# Altium PCB PulseAmplifier.PcbDoc
Units mil, origin at the board's own origin, x right, y up, seen from the top; angles counter-clockwise.
Board outline 4196.85 x 2165.35 mil, 2 copper layers (Top Layer, Bottom Layer); 92 components, 31 nets, 217 pads, 74 vias.
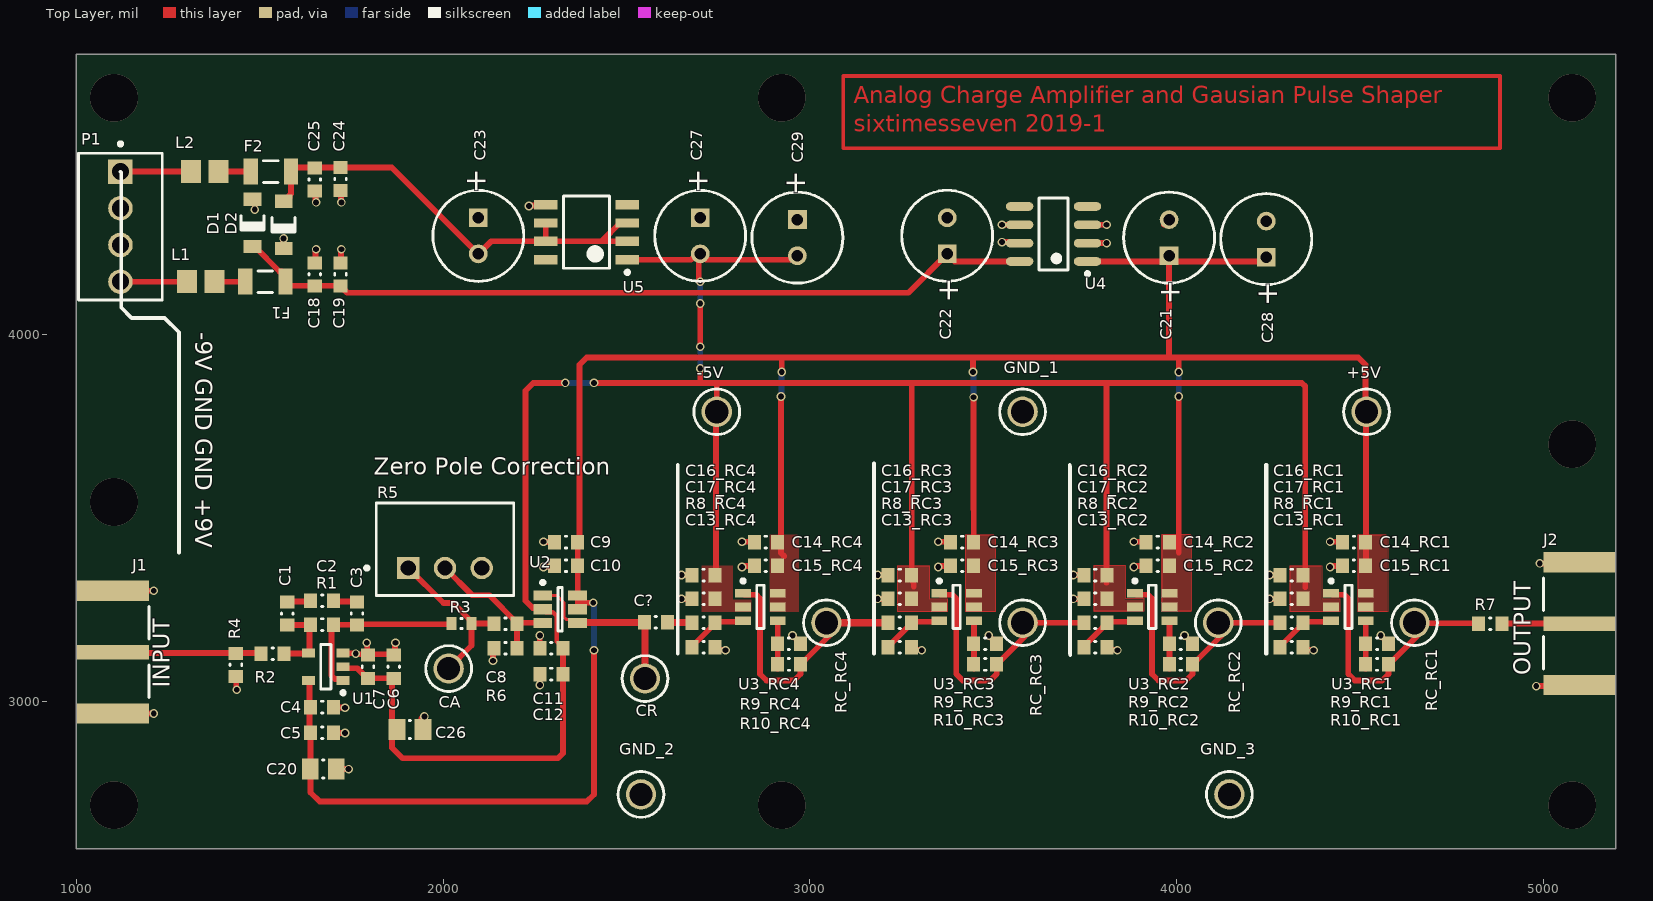
[diagram p0: Top Layer view]
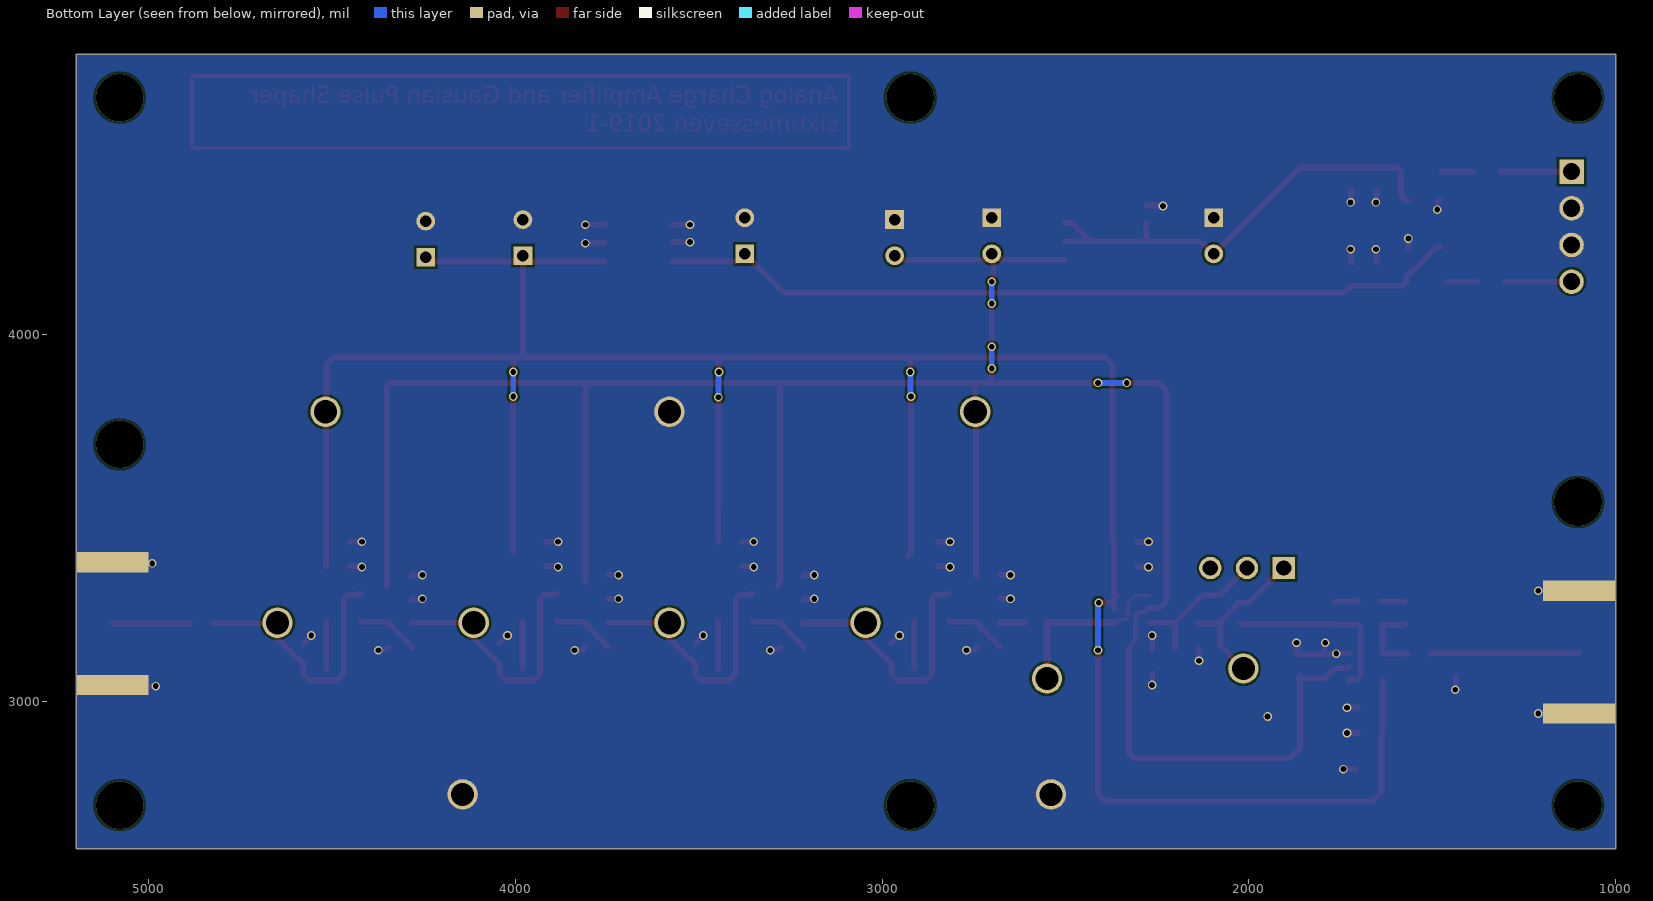
[diagram p1: Bottom Layer view, seen from below]

## Layer stack, top to bottom
Top Solder: solder mask 0.4, Solder Resist, Dk 3.5
Top Layer: signal copper 1.4
Dielectric 1: dielectric 12.6, FR-4, Dk 4.8
Bottom Layer: signal copper 1.4
Bottom Solder: solder mask 0.4, Solder Resist, Dk 3.5

## Board outline
1000,2598.43 5196.85,2598.43 5196.85,4763.78 1000,4763.78

## Design rules (kind name [scope] priority, off if disabled: settings)
Clearance [All] p1: gap=6.3 ignorepadtopadclearanceinfootprint=FALSE
PlaneConnect [All] p1: planeconnectstyle=Direct reliefexpansion=20 reliefentries=4 reliefconductorwidth=10 reliefairgap=10
PolygonConnect [All] p1: connectstyle=Direct reliefconductorwidth=10 reliefentries=4 polygonreliefangle="90 Angle" airgapwidth=10
RoomDefinition pulseAmplifier [InComponentClass('pulseAmplifier')] p1: confinementstyle=ConfineIn formatcopy=TRUE lockcomponents=FALSE outline 0,0 2000,0 2000,1000 0,1000
RoomDefinition Power [InComponentClass('Power')] p2: confinementstyle=ConfineIn formatcopy=TRUE lockcomponents=FALSE outline 0,0 2000,0 2000,1000 0,1000
RoomDefinition CR [InComponentClass('CR')] p3: confinementstyle=ConfineIn formatcopy=TRUE lockcomponents=FALSE outline 0,0 2000,0 2000,1000 0,1000
RoomDefinition CPA [InComponentClass('CPA')] p4: confinementstyle=ConfineIn formatcopy=TRUE lockcomponents=FALSE outline 0,0 2000,0 2000,1000 0,1000
RoomDefinition RC4 [InComponentClass('RC4')] p5: confinementstyle=ConfineIn formatcopy=TRUE lockcomponents=FALSE outline 2625,2949.17 3175,2949.17 3175,3654.17 2625,3654.17
RoomDefinition RC3 [InComponentClass('RC3')] p6: confinementstyle=ConfineIn formatcopy=TRUE lockcomponents=FALSE outline 3160,2949.17 3710,2949.17 3710,3654.17 3160,3654.17
RoomDefinition RC2 [InComponentClass('RC2')] p7: confinementstyle=ConfineIn formatcopy=TRUE lockcomponents=FALSE outline 3693.5,2949.17 4243.5,2949.17 4243.5,3654.17 3693.5,3654.17
RoomDefinition RC1 [InComponentClass('RC1')] p8: confinementstyle=ConfineIn formatcopy=TRUE lockcomponents=FALSE outline 4228.5,2949.17 4778.5,2949.17 4778.5,3654.17 4228.5,3654.17
RoutingVias [All] p1: holewidth=15.75 width=27.56 viastyle="Through Hole" minholewidth=15.75 minwidth=23.62 maxholewidth=196.85 maxwidth=3937.01
SolderMaskExpansion [All] p1: expansion=4
Width [All] p1: maxlimit=393.7 minlimit=6.3 preferedwidth=7.87
29 further rules are at their usual default settings.

## Classes and differential pairs
channel class RC: RC1 RC2 RC3 RC4
component class RC4: C13_RC4 C14_RC4 C15_RC4 C16_RC4 C17_RC4 R8_RC4 R9_RC4 R10_RC4 RC_RC4 U3_RC4
component class RC3: C13_RC3 C14_RC3 C15_RC3 C16_RC3 C17_RC3 R8_RC3 R9_RC3 R10_RC3 RC_RC3 U3_RC3
component class RC2: C13_RC2 C14_RC2 C15_RC2 C16_RC2 C17_RC2 R8_RC2 R9_RC2 R10_RC2 RC_RC2 U3_RC2
component class RC1: C13_RC1 C14_RC1 C15_RC1 C16_RC1 C17_RC1 R8_RC1 R9_RC1 R10_RC1 RC_RC1 U3_RC1
component class pulseAmplifier: C? J1 J2 R7
component class Power: +5V -5V C18 C19 C21 C22 C23 C24 C25 C27 C28 C29 D1 D2 F1 F2 GND_1 L1 L2 P1 U4 U5
component class CR: C8 C9 C10 C11 C12 CR GND_3 R5 R6
component class CPA: C1 C2 C3 C4 C5 C6 C7 C20 C26 CA GND_2 R1 R2 R3 R4 U1

## Components (designator, comment, footprint, x,y, rotation, side; value= is the part's Value field where it differs from the comment)
+5V "5010" KSTN-5010_V 4517.72,3789.37 r0 top
-5V "5010" KSTN-5010_V 2746.06,3789.37 r0 top
C1 "tbd" CAPC0603(1608)100_N 1575,3239.17 r270 top value=100nF
C2 "tbd" CAPC0603(1608)100_N 1670,3274.17 r180 top value=100nF
C3 "tbd" CAPC0603(1608)100_N 1765,3239.17 r90 top value=100nF
C4 "100nF" CAPC0603(1608)100_N 1670,2984.17 r180 top
C5 "1uF" CAPC0603(1608)100_N 1670,2914.17 r180 top value=100nF
C6 "100nF" CAPC0603(1608)100_N 1865,3094.17 r270 top
C7 "1uF" CAPC0603(1608)100_N 1795,3094.17 r270 top value=100nF
C8 "10nF" CAPC0603(1608)100_N 2170,3211.77 r180 top value=100nF
C9 "100nF" CAPC0603(1608)100_N 2335,3434.17 r0 top
C10 "1uF" CAPC0603(1608)100_N 2335,3369.17 r0 top value=100nF
C11 "100nF" CAPC0603(1608)100_N 2295,3144.17 r0 top
C12 "1uF" CAPC0603(1608)100_N 2295,3074.17 r0 top value=100nF
C13_RC1 "10nF" CAPC0603(1608)100_N 4313.5,3147.17 r0 top value=100nF (schematic designator C13)
C13_RC2 "10nF" CAPC0603(1608)100_N 3778.5,3147.17 r0 top value=100nF (schematic designator C13)
C13_RC3 "10nF" CAPC0603(1608)100_N 3245,3147.17 r0 top value=100nF (schematic designator C13)
C13_RC4 "10nF" CAPC0603(1608)100_N 2710,3147.17 r0 top value=100nF (schematic designator C13)
C14_RC1 "100nF" CAPC0603(1608)100_N 4483.5,3434.17 r0 top (schematic designator C14)
C14_RC2 "100nF" CAPC0603(1608)100_N 3948.5,3434.17 r0 top (schematic designator C14)
C14_RC3 "100nF" CAPC0603(1608)100_N 3415,3434.17 r0 top (schematic designator C14)
C14_RC4 "100nF" CAPC0603(1608)100_N 2880,3434.17 r0 top (schematic designator C14)
C15_RC1 "1uF" CAPC0603(1608)100_N 4483.5,3369.17 r0 top value=100nF (schematic designator C15)
C15_RC2 "1uF" CAPC0603(1608)100_N 3948.5,3369.17 r0 top value=100nF (schematic designator C15)
C15_RC3 "1uF" CAPC0603(1608)100_N 3415,3369.17 r0 top value=100nF (schematic designator C15)
C15_RC4 "1uF" CAPC0603(1608)100_N 2880,3369.17 r0 top value=100nF (schematic designator C15)
C16_RC1 "100nF" CAPC0603(1608)100_N 4313.5,3344.17 r0 top (schematic designator C16)
C16_RC2 "100nF" CAPC0603(1608)100_N 3778.5,3344.17 r0 top (schematic designator C16)
C16_RC3 "100nF" CAPC0603(1608)100_N 3245,3344.17 r0 top (schematic designator C16)
C16_RC4 "100nF" CAPC0603(1608)100_N 2710,3344.17 r0 top (schematic designator C16)
C17_RC1 "1uF" CAPC0603(1608)100_N 4313.5,3279.17 r0 top value=100nF (schematic designator C17)
C17_RC2 "1uF" CAPC0603(1608)100_N 3778.5,3279.17 r0 top value=100nF (schematic designator C17)
C17_RC3 "1uF" CAPC0603(1608)100_N 3245,3279.17 r0 top value=100nF (schematic designator C17)
C17_RC4 "1uF" CAPC0603(1608)100_N 2710,3279.17 r0 top value=100nF (schematic designator C17)
C18 "100nF" CAPC0603(1608)100_N 1650,4164.21 r270 top
C19 "1uF" CAPC0603(1608)100_N 1720,4164.21 r270 top value=100nF
C20 "10uF X7R 10V 0805" CAPC0805(2012)145_N 1673.23,2814.96 r180 top value=10uF
C21 "ECA-1HM470" PNSC-ECA-1HM470 3979.37,4264.25 r90 top
C22 "ECA-1HM470" PNSC-ECA-1HM470 3374.37,4269.25 r90 top
C23 "ECA-1HM470" PNSC-ECA-1HM470 2095.87,4269.09 r270 top
C24 "100nF" CAPC0603(1608)100_N 1720,4424.21 r90 top
C25 "1uF" CAPC0603(1608)100_N 1650,4422.72 r90 top value=100nF
C26 "10uF X7R 10V 0805" CAPC0805(2012)145_N 1909.45,2923.23 r180 top value=10uF
C27 "ECA-1HM470" PNSC-ECA-1HM470 2700.87,4269.09 r270 top
C28 "ECA-1HM470" PNSC-ECA-1HM470 4244.37,4260.04 r90 top
C29 "ECA-1HM470" PNSC-ECA-1HM470 2965.87,4264.09 r270 top
C? "10nF" CAPC0603(1608)100_N 2579.91,3215.47 r180 top value=100nF
CA "5010" KSTN-5010_V 2015,3089.17 r0 top
CR "5010" KSTN-5010_V 2550.38,3062.01 r0 top
D1 "MMSD4148T3G" ONSC-SOD123-2-425G-04_V 1480,4304.21 r90 top
D2 "MMSD4148T3G" ONSC-SOD123-2-425G-04_V 1565,4299.21 r90 top
F1 "ptc" LFUS-1206L012WR_V 1515,4144.21 r180 top
F2 "ptc" LFUS-1206L012WR_V 1530,4444.21 r0 top
GND_1 "5010" KSTN-5010_V 3580,3789.37 r90 top
GND_2 "5010" KSTN-5010_V 2539.37,2746.06 r90 top
GND_3 "5010" KSTN-5010_V 4143.7,2746.06 r90 top
J1 "32K145-400L5" ROS-32K145-400L5_V 1001.57,3134.17 r90 top
J2 "32K145-400L5" ROS-32K145-400L5_V 5196.85,3211.77 r270 top
L1 "FBMJ2125HM210NT" INDC2013X105X50ML20T30 1338.58,4144.21 r0 top
L2 "FBMJ2125HM210NT" INDC2013X105X50ML20T30 1350,4444.21 r0 top
P1 "22-27-2041" MOLX-22-27-2041_V 1120,4294.21 r90 top
R1 "tbd" RESC0603(1608)_N 1670,3209.17 r0 top value="100.00 Ohm"
R2 "0" RESC0603(1608)_N 1535,3129.17 r0 top value="100.00 Ohm"
R3 "100" RESC0603(1608)_L 2050,3211.77 r0 top value="100.00 Ohm"
R4 "open" RESC0603(1608)_N 1435,3099.17 r90 top value="100.00 Ohm"
R5 "3299W-1-103" BOUR-3299W-3_V 2005,3414.17 r0 top
R6 "1k" RESC0603(1608)_N 2170,3144.17 r0 top value="100.00 Ohm"
R7 "330" RESC0603(1608)_N 4855,3211.77 r0 top value="100.00 Ohm"
R8_RC1 "1k" RESC0603(1608)_N 4313.5,3214.17 r180 top value="100.00 Ohm" (schematic designator R8)
R8_RC2 "1k" RESC0603(1608)_N 3778.5,3214.17 r180 top value="100.00 Ohm" (schematic designator R8)
R8_RC3 "1k" RESC0603(1608)_N 3245,3214.17 r180 top value="100.00 Ohm" (schematic designator R8)
R8_RC4 "1k" RESC0603(1608)_N 2710,3214.17 r180 top value="100.00 Ohm" (schematic designator R8)
R9_RC1 "1k" RESC0603(1608)_N 4546.42,3157.17 r180 top value="100.00 Ohm" (schematic designator R9)
R9_RC2 "1k" RESC0603(1608)_N 4011.42,3157.17 r180 top value="100.00 Ohm" (schematic designator R9)
R9_RC3 "1k" RESC0603(1608)_N 3477.91,3157.17 r180 top value="100.00 Ohm" (schematic designator R9)
R9_RC4 "1k" RESC0603(1608)_N 2942.91,3157.17 r180 top value="100.00 Ohm" (schematic designator R9)
R10_RC1 "1k" RESC0603(1608)_N 4546.42,3100.39 r180 top value="100.00 Ohm" (schematic designator R10)
R10_RC2 "1k" RESC0603(1608)_N 4011.42,3100.39 r180 top value="100.00 Ohm" (schematic designator R10)
R10_RC3 "1k" RESC0603(1608)_N 3477.91,3100.39 r180 top value="100.00 Ohm" (schematic designator R10)
R10_RC4 "1k" RESC0603(1608)_N 2942.91,3100.39 r180 top value="100.00 Ohm" (schematic designator R10)
RC_RC1 "5010" KSTN-5010_V 4648.5,3214.17 r90 top (schematic designator RC)
RC_RC2 "5010" KSTN-5010_V 4113.5,3214.17 r90 top (schematic designator RC)
RC_RC3 "5010" KSTN-5010_V 3580,3214.17 r90 top (schematic designator RC)
RC_RC4 "5010" KSTN-5010_V 3045,3214.17 r90 top (schematic designator RC)
U1 "i11 -- OPA659IDBVT" TI-DBV5_L 1680,3094.17 r180 top
U2 "ADA4841-1YRJZ-R2" ADI-RJ-6_M 2318.9,3250.98 r0 top
U3_RC1 "ADA4851-1YRJZ-R2" ADI-RJ-6_N 4468.5,3257.17 r0 top (schematic designator U3)
U3_RC2 "ADA4851-1YRJZ-R2" ADI-RJ-6_N 3933.5,3257.17 r0 top (schematic designator U3)
U3_RC3 "ADA4851-1YRJZ-R2" ADI-RJ-6_N 3400,3257.17 r0 top (schematic designator U3)
U3_RC4 "ADA4851-1YRJZ-R2" ADI-RJ-6_N 2865,3257.17 r0 top (schematic designator U3)
U4 "LM78L05ACMX" M08A_L 3664.37,4274.25 r180 top
U5 "LM79L05ACMX" D0008A_M 2390.87,4279.09 r180 top

## Footprints (in the part's own frame and the unit in brackets; to place one, negate y for a bottom-side part, rotate by r counter-clockwise, add the part's x,y. Pads: shape width x height; smd on the part's side, far side on the other; paste and mask are expansions set on the pad)
ADI-RJ-6_M [mm] "SOT23, 6-Leads, Body 2.9x1.6mm, Pitch 0.95mm, IPC Low Density"
  rect 1.3x0.7 smd: 1(-1.2,0.95) 2(-1.2,0) 3(-1.2,-0.95) 4(1.2,-0.95) 5(1.2,0) 6(1.2,0.95)
  silkscreen extent -1.32,-1.5 0.15,1.97, body extent -0.85,-1.5 0.85,1.5, height 1.45
ADI-RJ-6_N [mm] "SOT23, 6-Leads, Body 2.9x1.6mm, Pitch 0.95mm, IPC Medium Density"
  rect 1.1x0.6 smd: 1(-1.2,0.95) 2(-1.2,0) 3(-1.2,-0.95) 4(1.2,-0.95) 5(1.2,0) 6(1.2,0.95)
  silkscreen extent -1.32,-1.5 0.25,1.92, body extent -0.85,-1.5 0.85,1.5, height 1.45
BOUR-3299W-3_V [mm] "TH, 3-Leads, Body 9.53x6.4mm, Pitch 2.54mm"
  rect 1.55x1.55 hole 1.05: 1(-2.54,-1.29)
  round 1.55 hole 1.05: 2(0,-1.29) 3(2.54,-1.29)
  silkscreen extent -5.54,-3.2 4.76,3.2, body extent -4.76,-3.05 4.76,3.05, height 11.55
CAPC0603(1608)100_N [mm] "Chip Capacitor, Body 1.6x0.8mm, Height 1.0mm, IPC Medium Density"
  rect 0.9x1 smd: 1(-0.8,0) 2(0.8,0)
  silkscreen extent -0.05,-0.4 0.05,0.4, body extent -0.87,-0.48 0.88,0.47, height 1
CAPC0805(2012)145_N [mm] "Chip Capacitor, Body 2.0x1.2mm, Height 1.45mm, IPC Medium Density"
  rect 1.15x1.45 smd: 1(-0.9,0) 2(0.9,0)
  silkscreen extent -0.05,-0.62 0.05,0.63, body extent -1.1,-0.72 1.1,0.73, height 1.45
D0008A_M [mm] "SOIC, 8-Leads, Body 5x4mm, Pitch 1.27mm, IPC Low Density"
  rrect15% 1.65x0.65 smd: 1(-2.825,1.905) 2(-2.825,0.635) 3(-2.825,-0.635) 4(-2.825,-1.905) 5(2.825,-1.905) 6(2.825,-0.635) 7(2.825,0.635) 8(2.825,1.905)
  silkscreen extent -2.95,-2.5 1.6,2.9, body extent -3,-2.45 3,2.45, height 1.63
INDC2013X105X50ML20T30 [mm] "Chip Inductor, 2-Leads, Body 2.2x1.45mm, IPC Low Density"
  rect 1.39x1.59 smd: 1(-0.955,0) 2(0.955,0)
  body extent -1.1,-0.72 1.1,0.72, height 1.05
KSTN-5010_V [mm] "Test Point, Dia 3.17mm"
  round 2.1 hole 1.6: 1(0,0)
  silkscreen extent -1.59,-1.58 1.59,1.58, body extent -1.59,-1.59 1.59,1.59, height 8.13
LFUS-1206L012WR_V [mm] "SMD, 2-Leads, Body 3.2x1.65mm"
  rect 1x1.8 smd: 1(-1.4,0) 2(1.4,0)
  silkscreen extent -0.5,-0.75 0.5,0.75, body extent -1.6,-0.82 1.6,0.82, height 1.45
M08A_L [mm] "SOIC, 8-Leads, Body 4.9x3.9mm, Pitch 1.27mm, IPC High Density"
  oval 1.9x0.6 smd: 1(-2.35,1.905) 2(-2.35,0.635) 3(-2.35,-0.635) 4(-2.35,-1.905) 5(2.35,-1.905) 6(2.35,-0.635) 7(2.35,0.635) 8(2.35,1.905)
  silkscreen extent -2.48,-2.5 1,2.88, body extent -2,-2.5 2,2.5, height 1.75
MOLX-22-27-2041_V [mm] "CONN, 4-Leads, Body 10.16x5.8mm, Pitch 2.54mm"
  rect 1.7x1.7 hole 1.19: 1(3.81,0)
  round 1.7 hole 1.19: 2(1.27,0) 3(-1.27,0) 4(-3.81,0)
  silkscreen extent -5.08,-2.9 5.85,2.9, body extent -5.08,-2.9 5.08,2.9, height 11.7
ONSC-SOD123-2-425G-04_V [mm] "SOD123, 2-Leads, Body 2.69x1.6mm, Height 1.35mm"
  rect 0.915x1.22 smd: 1(-1.637,0) 2(1.637,0)
  silkscreen extent -0.5,-0.8 0.5,0.8, body extent -1.35,-0.8 1.35,0.8, height 1.35
PNSC-ECA-1HM470 [mm]
  rect 1.3x1.3 hole 0.8: 1(-1.25,0)
  round 1.3 hole 0.8: 2(1.25,0)
  silkscreen extent -3.15,-3.15 3.15,3.15, body extent -3.15,-3.15 3.15,3.15, height 12.2
RESC0603(1608)_L [mm] "Chip Resistor, Body 1.6x0.8mm, IPC High Density"
  rect 0.7x0.9 smd: 1(-0.7,0) 2(0.7,0)
  silkscreen extent -0.05,-0.35 0.05,0.35, body extent -0.85,-0.47 0.85,0.47, height 0.6
RESC0603(1608)_N [mm] "Chip Resistor, Body 1.6x0.8mm, IPC Medium Density"
  rect 0.9x1 smd: 1(-0.8,0) 2(0.8,0)
  silkscreen extent -0.05,-0.4 0.05,0.4, body extent -0.85,-0.47 0.85,0.47, height 0.6
ROS-32K145-400L5_V [mm] "SMA Right Angle Jack, Edge Mount, 14.25x9.5x4.46mm, Rosenberger Recommended"
  rect 1x5 smd: 1(0,-2.5)
  rect 1.4x5 smd: MP(-4.25,-2.5) MP(4.25,-2.5)
  rect 1.4x5 smd far side paste-2: MP(-4.25,-2.5) MP(4.25,-2.5)
  silkscreen extent -3.15,-5 3.15,-5, body extent -4.75,-4.75 4.75,9.5, height 4.2
TI-DBV5_L [mm] "SOT23, 5-Leads, Body 2.9x1.6mm, Pitch 0.95mm, IPC High Density"
  rect 0.9x0.6 smd: 1(-1.2,0.95) 2(-1.2,0) 3(-1.2,-0.95) 4(1.2,-0.95) 5(1.2,0.95)
  silkscreen extent -1.33,-1.55 0.35,1.92, body extent -0.87,-1.52 0.87,1.53, height 1.45

## Part data
+5V -5V CA CR GND_1 GND_2 GND_3 RC_RC1 RC_RC2 RC_RC3 RC_RC4: library part CMP-1672-00002-3, "Test Point, Red, Through Hole, RoHS, Bulk", Colour=Red, Package Quantity=100, Contact Material=Bronze, Contact Plating=Silver, DatasheetVersion="Rev. F, 12/2013", Height="8.12 mm", Mount="Through Hole", Mounting Technology="Through Hole", PackageDescription="1-Pin Through Hole Device, Dia 3.17 mm", PackageReference=5010, Packaging=Bulk, Pins=1, REACH SVHC="No SVHC", RoHSCompliant=true
C1 C2 C3 C5 C7 C10 C12 C15_RC1 C15_RC2 C15_RC3 C15_RC4 C17_RC1 C17_RC2 C17_RC3 C17_RC4 C19 C25: library part CMP-1035-02589-1, "CAP 1uF 25V ±20% 0603 (1608 Metric) Thickness 1mm SMD", Case-EIA=0603, Case-Metric=1608, Rated Voltage="25 V", Tolerance=±20%, Max Thickness="1 mm", Technology=SMT
C4 C6 C9 C11 C14_RC1 C14_RC2 C14_RC3 C14_RC4 C16_RC1 C16_RC2 C16_RC3 C16_RC4 C18 C24: library part CMP-1035-02589-1, "CAP 100nF 25V ±20% 0603 (1608 Metric) Thickness 1mm SMD", Case-EIA=0603, Case-Metric=1608, Rated Voltage="25 V", Tolerance=±20%, Max Thickness="1 mm", Technology=SMT
C8 C13_RC1 C13_RC2 C13_RC3 C13_RC4 C?: library part CMP-1035-02589-1, "10nF Film", Case-EIA=0603, Case-Metric=1608, Rated Voltage="25 V", Tolerance=±20%, Max Thickness="1 mm", Technology=SMT
C20 C26: library part CMP-1036-04932-1, Case-EIA=0805, Case-Metric=2012, Rated Voltage="25 V", Tolerance=±10%, Max Thickness="1.45 mm", Technology=SMT
C21 C22 C23 C27 C28 C29: library part CMP-1665-00013-1, "CAP ALUM 47UF 50V 20% RADIAL", ComponentLink1Description=Datasheet, ComponentLink1URL=http://industrial.panasonic.com/cdbs/www-data/pdf/RDF0000/ABA0000C1047.pdf, PackageReference=ECA-1HM470, PartNumber=ECA-1HM470
D1 D2: library part CMP-0895-00002-1, "Switching Diode, 100 V, 200 mA, -55 to 150 degC, 2-Pin SOD123 (425), RoHS, Tape and Reel", Manufacturer="ON Semiconductor", Temperature Range="-55 to 150 degC", CD (Max)="4 pF", ComponentLink1Description="Manufacturer URL", ComponentLink1URL=http://www.onsemi.com/, ComponentLink2Description=Datasheet, ComponentLink2URL=http://www.onsemi.com/pub_link/Collateral/MMSD4148T1-D.PDF, ComponentLink3Description="Package Specification", ComponentLink3URL=http://www.onsemi.com/pub_link/Collateral/425-04.PDF, DatasheetVersion="Rev. 11", IR @ VR="75 V (Max)=50 uA", Mounting Technology="Surface Mount", PackageDescription="2-Pin SOD123, Body 2.69 x 1.6 mm, Height 1.35 mm", PackageReference=SOD123-2-425G-04, PackageVersion="Rev. 04G", Packing="Tape and Reel", PartNumber=MMSD4148T3G, PD (Max)="425 mW", RoHS=TRUE, Trr (Max)="4 ns", VBR (Min)="100 V", VF (Max)="1 A"
F1 F2: library part CMP-2000-05470-1, "200mA PTC", Hold Current [Ih]=0.125A, Manufacturer=Littelfuse, Operating Temp Range=-40to+85°C, Package Description="2-Pin Surface Mount Device, Body 3.2 x 1.65 mm", Package Reference=1206, Trip Current=0.29A, Working Voltage-Max=30V, Datasheet URL=https://datasheet.ciiva.com/26787/1206l012wr-26787215.pdf, Datasheet Version=04/2012, Manufacturer URL=http://www.littelfuse.com/, Mounting Technology=SurfaceMount, Size=1206
J1 J2: library part CMP-0751-00004-2, "SMA Right Angle Jack, Edge Mount, Up to 18 GHz, -55 to 155 degC", Manufacturer=Rosenberger, ComponentLink1Description="Manufacturer URL", ComponentLink1URL=http://www.rosenberger.de, ComponentLink2Description=Datasheet, ComponentLink2URL=http://rosenberger.de/ok/images/documents/db/32K145-400L5.pdf, ComponentLink3Description="Package Specification", ComponentLink3URL=http://rosenberger.de/ok/images/documents/db/32K145-400L5.pdf, ComponentLink4Description="Series Overview / Design Note", ComponentLink4URL=http://rosenberger.de/ok/images/documents/spez/32.pdf, ComponentLink5Description="Webshop / RFQ", ComponentLink5URL=http://www.rosenberger.com/en/contact/sales/, DatasheetVersion=b00, Desgin Note 2="For more information about DRC setting, please look at following webpage, http://techdocs.altium.com/display/SCRT/Design+Rule+for+Edge-Mount+Connectors", Design Note 1="Footprint in library is a generic example - only application specific footprint delivers High Performance", Mounting Technology="Surface Mount", PackageDescription="SMA Right Angle Jack, Edge Mount, 14.25 x 9.5 x 4.46 mm", PackageReference=32K145-400L5, PackageVersion=b00, PartNumber=32K145-400L5
L1 L2: library part CMP-1660-00003-1, "Chip Inductor, 21 Ohm, +/- 30%, 6 A, -40 to 125 degC, 0805 (2012 Metric), RoHS, Tape and Reel", Case\Package=0805, Case Code (Metric)=2012, Current Rating="6 A", Max Operating Temperature="125 degC", Min Operating Temperature="-40 degC", Package Quantity=1, Resistance="4 mohm", Tolerance=30%, Case Code (Imperial)=0805, ComponentLink1Description="Manufacturer URL", ComponentLink1URL=http://www.t-yuden.com/, ComponentLink2Description=Datasheet, ComponentLink2URL=http://ds.yuden.co.jp/TYCOMPAS/ut/detail.do?productNo=FBMJ2125HM210NT&fileName=FBMJ2125HM210NT_SS&mode=specSheetDownload, Core Material=Ferrite, DatasheetVersion=08/2016, Height="0.85 mm", Impedance="21 Ohm", Length="2 mm", Max Current Rating="6 A", Mount="Surface Mount", Mounting Technology="Surface Mount", PackageDescription="2-Pin Surface Mount Device, Body 2 x 1.25 mm", PackageReference=0805, Packaging="Tape and Reel", REACH SVHC=Unknown, RoHSCompliant=true, Width="1.25 mm"
P1: library part CMP-2000-05243-1, "Male Header, Pitch 2.54 mm, 1 x 4 Position, Height 11.7 mm, Tail Length 3.56 mm, RoHS, Bulk", Current Rating=4A, Manufacturer=Molex, Operating Temperature=0degCto+75degC, Voltage Rating=250V, Contact Material=Tinplatedbrass, Datasheet URL=http://www.molex.com/pdm_docs/sd/022272041_sd.pdf, Datasheet Version="Rev. F, 06/2009", Housing Material=Nylon(UL94V-0), Manufacturer URL=http://www.molex.com/
R1 R2 R3 R4 R7: library part CMP-1012-00397-1, "100R 0.1W 1% 0603 (1608 Metric)  SMD", Case-EIA=0603, Case-Metric=1608, Power="0.1 W", Tolerance="1 %", Technology=SMT
R5: library part CMP-2000-05584-1, "Square Trimpot(R) Trimming Potentiometer, 10 KOhm, +/- 10%, 500 mW, -55 to 125 degC, 3-Pin THD, RoHS, Tube", Manufacturer=Bourns, Operating Temperature Range=-55Cto+125C, Package Description="3-Pin Surface Mount Device, Body 9.53 x 6.1 mm, Pitch 2.54 mm", Package Reference=3299W, Power Rating=500mW(1/2W), Resistance=10kOhms, Tolerance=10%, Adjustment=TopCrossed, Brand=Bourns, Datasheet URL=http://www.bourns.com/docs/Product-Datasheets/3299.pdf, Datasheet Version=04/2014, Element Type=Cermet, Length=10.03mm, Manufacturer URL=http://www.bourns.com/, Mounting=PanelMount, Mounting Technology=ThroughHole, Packaging=Tube, Product=Multiturn, Product Category=TrimmerResistors-ThroughHole, Product Type=SquareTrimmingPotentiometer, Qualification=Commercial, RoHS="No /  / RoHSVersionAvailable", Series=3299, Taper=Linear, Termination Style=Pin, Tradename=Trimpot, Type=Trimmers, Unit Weight=0.035000oz, Width=9.53mm
R6 R8_RC1 R8_RC2 R8_RC3 R8_RC4 R9_RC1 R9_RC2 R9_RC3 R9_RC4 R10_RC1 R10_RC2 R10_RC3 R10_RC4: library part CMP-1012-00397-1, "1k 1% Metal film", Case-EIA=0603, Case-Metric=1608, Power="0.1 W", Tolerance="1 %", Technology=SMT
U1: library part CMP-0018-00409-1, "650 MHz Unity Gain Stable JFET Input Amplifier, 7 to 13 V, -40 to 85 degC, 5-pin SOT23 (DBV5), Green (RoHS & no Sb/Br)", Manufacturer="Texas Instruments", PartNumber=OPA659IDBVT, 2nd Harmonic(dBc)=79, 3rd Harmonic(dBc)=100, @ MHz=10, Acl, min stable gain(V/V)=2, BW @ Acl(MHz)=650, Code_JEDEC=MO-178, ComponentLink1Description="Manufacturer URL", ComponentLink1URL=http://www.ti.com/, ComponentLink2Description=Datasheet, ComponentLink2URL=http://www.ti.com/general/docs/lit/getliterature.tsp?genericPartNumber=OPA659&fileType=pdf, ComponentLink3Description="Package Specification", ComponentLink3URL=http://www.ti.com/litv/pdf/mpds018i, DatasheetVersion=SBOS342B, Eco-Plan="Green (RoHS & no Sb/Br)", Iib(Max)(nA)=1.2, Io(Typ)(mA)=70, Iq per channel(Max)(mA)=33.5, Mounting Technology="Surface Mount", Number of Channels=1, PackageDescription="5-Pin Plastic Small Outline, Body 1.6 x 2.9 mm, Pitch 0.95 mm", PackageReference=DBV5, PackageVersion="4073253-4/K, 03/2006", Slew Rate(Typ)(V/us)=2550, Sub Family="High Output Current Amplifier (>=50mA), High Speed Amplifier (>=50MHz)", THD (Fc is 1 MHz)(Typ)(dB)=-78, Vio(Max)(mV)=5, Vn at Flatband(Typ)(nV/rtHz)=8.9, Vs(Max)(V)=13, Vs(Min)(V)=7
U2: library part CMP-0384-01553-2, "Single Channel Low Wide Band Noise Operational Amplifier, 80 MHz BW, 13 V/us SR, Industrial, 6-pin SOT23 (RJ-6), Reel", Amplifiers Per Package=1, Generic Part Number=ADA4841-1, Input Bias Current=3uA, Input Offset Voltage=40uV, Manufacturer="Analog Devices", Code_JEDEC=MO-178-AB, ComponentLink1Description="Manufacturer URL", ComponentLink1URL=http://www.analog.com/en/index.html, ComponentLink2Description=Datasheet, ComponentLink2URL=http://www.analog.com/static/imported-files/data_sheets/ADA4841-1_4841-2.pdf, ComponentLink3Description="Package Specification", ComponentLink3URL=http://www.analog.com/static/imported-files/packages/PKG_PDF/SOT-23(RJ)/RJ_6.pdf, ComponentLink4Description="Reference Circuit", ComponentLink4URL=http://www.analog.com/en/all-operational-amplifiers-op-amps/operational-amplifiers-op-amps/ada4841-1/products/product.html#product-recommendations, DatasheetVersion="Rev. E", Iq/Amp=1.5mA, Mounting Technology="Surface Mount", PackageDescription="6-Pin Small Outline Transistor Package, Body 2.9 x 1.6 mm, Pitch 0.95 mm", PackageReference=RJ-6, PackageVersion=121608-A, PartNumber=ADA4841-1YRJZ-R2, RevisionNote="Reference Circuit URL fixed", Slew Rate=13V/us, Small Signal Bandwidth=80MHz, V Span Max=12V, V Span Min=2.7V
U3_RC1 U3_RC2 U3_RC3 U3_RC4: library part CMP-0384-01563-2, "Single Channel Low Power Operational Amplifier, 130 MHz BW, 375 V/us SR, Industrial, 6-pin SOT23 (RJ-6), Reel", Amplifiers Per Package=1, Generic Part Number=ADA4851-1, Input Bias Current=2.2uA, Input Offset Voltage=600uV, Manufacturer="Analog Devices", Automotive Qualified=Yes, Code_JEDEC=MO-178-AB, ComponentLink1Description="Manufacturer URL", ComponentLink1URL=http://www.analog.com/en/index.html, ComponentLink2Description=Datasheet, ComponentLink2URL=http://www.analog.com/static/imported-files/data_sheets/ADA4851-1_4851-2_4851-4.pdf, ComponentLink3Description="Package Specification", ComponentLink3URL=http://www.analog.com/static/imported-files/packages/PKG_PDF/SOT-23(RJ)/RJ_6.pdf, ComponentLink4Description="Reference Circuit", ComponentLink4URL=http://www.analog.com/en/all-operational-amplifiers-op-amps/operational-amplifiers-op-amps/ada4851-1/products/product.html#product-recommendations, DatasheetVersion="Rev. J", Iq/Amp=3.2mA, Mounting Technology="Surface Mount", PackageDescription="6-Pin Small Outline Transistor Package, Body 2.9 x 1.6 mm, Pitch 0.95 mm", PackageReference=RJ-6, PackageVersion=121608-A, PartNumber=ADA4851-1YRJZ-R2, RevisionNote="Reference Circuit URL fixed", Slew Rate=375V/us, Small Signal Bandwidth=130MHz, V Span Max=12V, V Span Min=2.7V
U4: library part CMP-0062-01154-2, "3-Terminal Positive Regulators, 8-pin Narrow SOIC", Manufacturer="National Semiconductor", PackageTopMarking=NSZXTT*LM78L*05ACM, PowerWise=N, Code_IPC=SOIC127P600-8, Code_JEDEC=MS-012-AA, ComponentLink1Description="LM78L05 Datasheet", ComponentLink1URL=http://www.national.com/ds/LM/LM78L05.pdf, ComponentLink2Description="LM78L05 Web Page", ComponentLink2URL=http://www.national.com/pf/LM/LM78L05.html, ComponentLink3Description="M08A Package Page", ComponentLink3URL=http://www.national.com/packaging/folders/m08a.html, CompType="LDO IC", DatasheetVersion=Apr-2006, PackageDescription="SOIC Narrow, 4.9 x 3.9 x 1.45mm, 8 Lead, 1.27mm Pitch", PackageReference=M08A, PackageVersion="revM, May-2009", PinCount=8, RevisionNote="Component URLs added", RoHS=N
U5: library part CMP-0062-01120-3, "Series 3-Terminal Negative Regulators, 8-pin Narrow SOIC", Manufacturer="Texas Instruments", PackageTopMarking=NSZXTT*LM79L*05ACM, PowerWise=N, Code_IPC=SOIC127P600-8, Code_JEDEC=MS-012-AA, ComponentLink1Description="Datasheet URL", ComponentLink1URL=http://www.ti.com/general/docs/lit/getliterature.tsp?genericPartNumber=LM79L05&fileType=pdf, CompType="LDO IC", PackageDescription="SOIC Narrow, 4.9 x 3.9 x 1.45mm, 8 Lead, 1.27mm Pitch", PackageReference=D0008A, PinCount=8, RoHS=N

## Via types
v1: diameter 23.62, hole 15.75, Top Layer to Bottom Layer, 66 vias
v2: diameter 129.92, hole 129.92, Top Layer to Bottom Layer, 8 vias

## Nets (pads, with @x,y where several pads share a name; then routed paths per layer and width w, separated by ;. In a path a pad name is that pad's centre, name@x,y a point inside that pad or via, vN(x,y) a via of type N, cw(c..) or ccw(c..) an arc to the next point about the centre after c; other vN are vias at no path point)
+5V: +5V.1 C4.2 C5.2 C9.2 C10.2 C14_RC1.2 C14_RC2.2 C14_RC3.2 C14_RC4.2 C15_RC1.2 C15_RC2.2 C15_RC3.2 C15_RC4.2 C20.2 C21.1 C28.1 U1.5 U2.5 U2.6 U3_RC1.5 U3_RC1.6 U3_RC2.5 U3_RC2.6 U3_RC3.5 U3_RC3.6 U3_RC4.5 U3_RC4.6 U4.1 | length 7400
  Top Layer w15.75: U1.5 1635.63,3053.9 1635.63,2917.05 C5.2 1638.5,2751.26 1663.39,2726.38 2391.73,2726.38 2411.42,2746.06 v1(2411.42,3139.17) ; U2.6@2362.32,3289.61 U2.6@2362.32,3292.6 ; U2.5 2367.13,3250 2367.13,3268.74 ; C9.2 C9.2@2366.87,3433.8 ; U2.6@2367.13,3287.76 2367.13,3268.74 ; U2.6@2369.09,3289.72 2366.87,3291.95 C9.2@2366.87,3433.8 ; v1(2409.45,3268.74) 2367.13,3268.74 ; v1(2921.34,3830.98) 2921.34,3404.33 2930,3395.67 ; v1(2923.23,3897.64) 2923.23,3937.01 ; v1(3444.88,3897.64) 3444.88,3937.01 ; v1(3446.42,3828.74) 3446.42,3523.62 3446.5,3523.54 C14_RC3.2 ; U4.1 C21.1@3979.37,4199.25 ; C21.1 C21.1@3979.37,4199.25 ; 4005.91,3405.51 v1(4005.91,3830.98) ; v1(4005.91,3897.64) 4005.91,3937.01 ; C28.1 4232.8,4199.25 C21.1@3979.37,4199.25 ; C15_RC1.2 4516.36,3370.53 4516.36,3788.01 +5V.1 4514.92,3792.17 4514.92,3917.32 4495.24,3937.01 4005.91,3937.01 ; C9.2@2366.87,3433.8 2372.05,3438.98 2372.05,3917.32 2391.73,3937.01 2923.23,3937.01 ; 2923.23,3937.01 3444.88,3937.01 ; 3444.88,3937.01 3986.22,3937.01 ; C21.1@3979.37,4199.25 3979.37,3943.86 3986.22,3937.01 ; 3986.22,3937.01 4005.91,3937.01
  Bottom Layer w15.75: v1(2411.42,3139.17) v1@2411.42,3267.72 ; v1(2921.34,3830.98) 2922.28,3831.93 2922.28,3896.69 v1(2923.23,3897.64) ; v1(3444.88,3897.64) 3446.42,3896.1 v1(3446.42,3828.74) ; v1(4005.91,3830.98) v1(4005.91,3897.64)
+9V: C18.2 C19.2 C22.1 D1.1 F1.1 U4.8 | length 2205.6
  Top Layer w15.75: D1.1 1486,4239.74 1553.98,4171.77 1558.31,4171.77 1570.12,4159.96 F1.1 1581.61,4132.72 C18.2 C19.2 1738.54,4114.17 3268.5,4114.17 C22.1 3395.16,4199.25 U4.8
-5V: -5V.1 C6.2 C7.2 C11.2 C12.2 C16_RC1.2 C16_RC2.2 C16_RC3.2 C16_RC4.2 C17_RC1.2 C17_RC2.2 C17_RC3.2 C17_RC4.2 C26.2 C27.2 C29.2 U1.2 U2.2 U3_RC1.2 U3_RC2.2 U3_RC3.2 U3_RC4.2 U5.1 | length 7036
  Top Layer w7.87: U2.2 U2.2@2277.56,3245.08
  Top Layer w11.81: U2.2@2277.56,3245.08 2279.53,3243.11 2298.76,3243.11 2309.45,3232.42 2309.45,3163.19 2326.5,3146.14 C11.2
  Top Layer w15.75: U1.2 1731.18,3090.24 1765.47,3090.24 1793.03,3062.68 C7.2 C6.2@1860.24,3062.68 ; C6.2@1860.24,3070.87 C6.2@1860.24,3062.68 ; C6.2 C6.2@1860.24,3062.68 ; U2.2@2272.76,3254.17 2244.09,3254.17 2224.41,3273.86 2224.41,3846.92 2245.6,3868.11 v1(2332.68,3868.11) ; C11.2 C12.2 2326.5,2857.99 2312.99,2844.49 1889.15,2844.49 1860.24,2873.4 C6.2@1860.24,3062.68 ; v1(2411.42,3868.11) 2696.85,3868.11 ; U5.1 2675.49,4204.09 2691.28,4219.88 C27.2 ; v1(2700.87,3907.48) 2700.79,3907.4 2700.79,3872.05 2696.85,3868.11 ; v1(2700.87,3966.54) v1(2700.87,4084.65) ; v1(2700.87,4143.7) 2696.85,4147.72 2696.85,4215.87 C27.2 ; C16_RC4.2 2741.5,3341.89 2743.78,3344.17 2743.78,3787.09 -5V.1 2746.06,3858.27 ; C29.2 2955.08,4204.09 2716.65,4204.09 C27.2 ; 3282.98,3312.68 3282.98,3324.17 3277.56,3329.6 3277.56,3868.11 ; 3809.06,3324.17 3809.06,3867.17 3810,3868.11 ; 4350.39,3310.78 4350.39,3858.89 4341.17,3868.11 3810,3868.11 ; 2696.85,3868.11 3277.56,3868.11 ; 3277.56,3868.11 3810,3868.11
  Bottom Layer w15.75: v1(2332.68,3868.11) v1(2411.42,3868.11) ; v1(2700.87,3907.48) v1(2700.87,3966.54) ; v1(2700.87,4084.65) v1(2700.87,4143.7)
-9V: C23.2 C24.2 C25.2 D2.2 F2.2 U5.2 U5.3 U5.6 U5.7 | length 1266.4
  Top Layer w15.75: D2.2 1571,4363.68 1581.14,4373.82 1581.14,4379.82 1585.12,4383.8 F2.2 1596.61,4455.71 C24.2 1860.04,4455.71 C23.2 2097.04,4219.88 2131.25,4254.09 U5.7 ; U5.6 U5.7 ; U5.2 2432.4,4254.09 ; U5.3 2482.4,4304.09 2432.4,4254.09 ; U5.7 2432.4,4254.09
GND: C4.1 C5.1 C6.1 C7.1 C9.1 C10.1 C11.1 C12.1 C13_RC1.2 C13_RC2.2 C13_RC3.2 C13_RC4.2 C14_RC1.1 C14_RC2.1 C14_RC3.1 C14_RC4.1 C15_RC1.1 C15_RC2.1 C15_RC3.1 C15_RC4.1 C16_RC1.1 C16_RC2.1 C16_RC3.1 C16_RC4.1 C17_RC1.1 C17_RC2.1 C17_RC3.1 C17_RC4.1 C18.1 C19.1 C20.1 C21.2 C22.2 C23.1 C24.1 C25.1 C26.1 C27.1 C28.2 C29.1 D1.2 D2.1 GND_1.1 GND_2.1 GND_3.1 J1.MP J2.MP P1.2 P1.3 R4.1 R6.1 R9_RC1.1 R9_RC2.1 R9_RC3.1 R9_RC4.1 U1.3 U4.2 U4.3 U4.6 U4.7 U5.5 | length 2323.7
  Top Layer w15.75: J1.MP@1100,2966.85 v1(1210.63,2966.85) ; J1.MP@1100,3301.5 v1(1210.63,3301.5) ; R4.1 1436,3066.67 1436,3032.5 v1(1437.01,3031.5) ; D1.2 1486.22,4362.46 v1(1486.22,4340.55) ; v1(1564.96,4261.81) v1(1564.96,4261.81) D2.1 ; C18.1 1652.04,4197.75 1652.04,4230.78 v1(1653.54,4232.28) ; C25.1 1652.04,4389.18 1652.04,4361.74 v1(1653.54,4360.24) ; C5.1 1701.89,2913.78 1731.89,2913.78 v1(1732.28,2913.39) ; C4.1 1702.44,2983.23 1731.34,2983.23 v1(1732.28,2982.28) ; C20.1 1728.07,2814.96 v1(1742.13,2814.96) ; C19.1 1721.22,4196.93 1721.22,4231.06 v1(1722.44,4232.28) ; C24.1 1721.22,4391.5 1721.22,4361.46 v1(1722.44,4360.24) ; U1.3 1728.07,3130.75 1760.98,3130.75 v1(1761.81,3129.92) 1763.32,3128.41 C7.1@1792.85,3128.41 ; v1(1791.34,3159.45) 1792.85,3157.94 C7.1@1792.85,3128.41 ; C7.1 1792.85,3127.82 C7.1@1792.85,3128.41 ; v1(1870.08,3159.45) 1868.57,3157.94 1868.57,3129.24 C6.1 1862.25,3128.41 C7.1@1792.85,3128.41 ; v1@1940.43,2952.76 1948.82,2952.76 v1(1948.82,2958.66) ; v1(2135.83,3110.24) 2135.83,3141.5 R6.1 ; v1(2234.25,4350.39) 2235.76,4351.9 2277.45,4351.9 U5.5 ; C12.1 2263.64,3074.04 2263.64,3044.59 v1(2263.78,3044.45) ; C11.1 2263.64,3144.31 2263.64,3179 v1(2263.78,3179.13) ; v1(2273.62,3366.14) 2275.13,3367.65 2301.98,3367.65 C10.1 ; v1(2273.62,3435.04) 2274.06,3434.61 2303.07,3434.61 C9.1 ; v1(2650,3279.17) C17_RC4.1 ; v1(2650,3344.17) C16_RC4.1 C16_RC4.1@2676.5,3346.18 ; C13_RC4.2 2747.98,3140.68 2768.49,3140.68 v1(2770,3139.17) ; v1(2814.96,3366.14) 2814.96,3369.17 C15_RC4.1 ; v1(2814.96,3435.04) 2848.5,3435.04 C14_RC4.1 ; v1(2952.74,3179.13) 2972.43,3159.44 2974.41,3157.48 R9_RC4.1 ; v1(3185,3279.17) C17_RC3.1 ; v1(3185,3344.17) C16_RC3.1 C16_RC3.1@3211.5,3346.18 ; C13_RC3.2 3282.98,3140.68 3303.49,3140.68 v1(3305,3139.17) ; v1(3349.96,3366.14) 3349.96,3369.17 C15_RC3.1 ; v1(3349.96,3435.04) 3383.5,3435.04 C14_RC3.1 ; v1(3487.74,3179.13) 3507.43,3159.44 3509.41,3157.48 R9_RC3.1 ; v1(3523.62,4251.97) 3569.13,4251.97 U4.7 ; v1(3523.62,4299.25) U4.6 ; v1(3718.5,3279.17) C17_RC2.1 ; v1(3718.5,3344.17) C16_RC2.1 C16_RC2.1@3745,3346.18 ; U4.2 v1(3809.06,4249.25) ; U4.3 v1(3809.06,4299.25) ; C13_RC2.2 3816.49,3140.68 3837,3140.68 v1(3838.5,3139.17) ; v1(3883.46,3366.14) 3883.46,3369.17 C15_RC2.1 ; v1(3883.46,3435.04) 3917.01,3435.04 C14_RC2.1 ; C21.2@3965.16,4299.25 C21.2 ; v1(4021.25,3179.13) 4040.94,3159.44 4042.91,3157.48 R9_RC2.1 ; v1(4253.5,3279.17) C17_RC1.1 ; v1(4253.5,3344.17) C16_RC1.1 C16_RC1.1@4280,3346.18 ; C13_RC1.2 4351.49,3140.68 4372,3140.68 v1(4373.5,3139.17) ; v1(4418.46,3366.14) 4418.46,3369.17 C15_RC1.1 ; v1(4418.46,3435.04) 4452.01,3435.04 C14_RC1.1 ; v1(4556.25,3179.13) 4575.94,3159.44 4577.91,3157.48 R9_RC1.1 ; v1(4980.31,3041.34) 5095.31,3041.34 J2.MP@5098.43,3044.45 ; v1(4990.16,3375.98) 5095.31,3375.98 J2.MP@5098.43,3379.09
  Bottom Layer w15.75: J1.MP@1100,2966.85 v1(1210.63,2966.85)
NetC1_1: C1.1 C2.2 | length 65
  Top Layer w15.75: C1.1 1576.75,3272.42 1636.75,3272.42 C2.2
NetC1_2: C1.2 R1.1 R2.2 U1.4 | length 209.2
  Top Layer w15.75: R2.2 1567.7,3130.37 1631.56,3130.37 U1.4 1635.63,3134.45 1635.63,3206.3 R1.1@1637.01,3207.68 ; C1.2 R1.1@1637.01,3207.68 ; R1.1 R1.1@1637.01,3207.68
NetC2_1: C2.1 C3.2 | length 65
  Top Layer w15.75: C2.1 1703.25,3272.42 1763.25,3272.42 C3.2
NetC3_1: C3.1 R1.2 R3.1 U1.1 | length 502
  Top Layer w15.75: U1.1 1723.31,3060.71 1705.22,3060.71 1695.35,3070.57 1695.35,3203.03 R1.2 1702.24,3208.43 1764.25,3208.43 C3.1 1767.05,3209.72 2020.39,3209.72 R3.1
NetC8_1: C8.1 R5.2 R6.2 U2.3 | length 397.8
  Top Layer w15.75: R5.2 2079.23,3289.15 2126.08,3289.15 2201.5,3213.74 C8.1 ; R6.2 C8.1 ; U2.3@2270.26,3214.27 2204,3214.27 C8.1
NetC8_2: C8.2 CA.1 R3.2 R5.1 | length 448.3
  Top Layer w15.75: R5.1 2000.67,3267.72 2027.56,3267.72 2077.56,3217.72 R3.2 ; CA.1 2077.56,3151.73 R3.2 ; C8.2 R3.2
NetC13_RC1_1: C13_RC1.1 R8_RC1.1 U3_RC1.3 | length 171.7
  Top Layer w15.75: C13_RC1.1 4282.01,3149.13 4335.16,3202.28 4335.16,3204.33 R8_RC1.1 4347.8,3216.97 4418.46,3216.97 U3_RC1.3
NetC13_RC2_1: C13_RC2.1 R8_RC2.1 U3_RC2.3 | length 171.7
  Top Layer w15.75: C13_RC2.1 3747.01,3149.13 3800.16,3202.28 3800.16,3204.33 R8_RC2.1 3812.8,3216.97 3883.46,3216.97 U3_RC2.3
NetC13_RC3_1: C13_RC3.1 R8_RC3.1 U3_RC3.3 | length 171.7
  Top Layer w15.75: C13_RC3.1 3213.5,3149.13 3266.65,3202.28 3266.65,3204.33 R8_RC3.1 3279.29,3216.97 3349.96,3216.97 U3_RC3.3
NetC13_RC4_1: C13_RC4.1 R8_RC4.1 U3_RC4.3 | length 171.7
  Top Layer w15.75: C13_RC4.1 2678.5,3149.13 2731.65,3202.28 2731.65,3204.33 R8_RC4.1 2744.29,3216.97 2814.96,3216.97 U3_RC4.3
NetC?_1: C?.1 R8_RC4.2 | length 66.7
  Top Layer w19.68: C?.1@2612.06,3214.82 2677.85,3214.82 R8_RC4.2
NetC?_2: C?.2 CR.1 U2.1 U2.4 | length 478.8
  Top Layer w7.87: U2.1 2310.04,3288.39 2329.72,3268.7 2329.72,3229.33 2335.63,3223.43 2353.35,3223.43 U2.4@2363.19,3213.58
  Top Layer w19.68: U2.4 2367.09,3214.53 C?.2@2547.47,3214.53 ; CR.1 C?.2@2550.38,3213.5
NetF1_2: F1.2 L1.2 | length 82.3
  Top Layer w15.75: L1.2@1377.6,4144.21 F1.2
NetF2_1: F2.1 L2.2 | length 87.3
  Top Layer w15.75: L2.2 F2.1
NetJ1_1: J1.1 R2.1 R4.2 | length 405.6
  Top Layer w15.75: J1.1 1102.5,3131.67 1501,3131.67 R2.1
NetJ2_1: J2.1 R7.2 | length 211.9
  Top Layer w15.75: R7.2 J2.1
NetL1_1: L1.1 P1.4 | length 182.4
  Top Layer w15.75: P1.4 L1.1@1302.4,4144.21
NetL2_1: L2.1 P1.1 | length 192.4
  Top Layer w15.75: P1.1 L2.1
NetR7_1: R7.1 R10_RC1.1 RC_RC1.1 U3_RC1.1 | length 735.5
  Top Layer w15.75: U3_RC1.1 4425.2,3290.63 4457.05,3290.63 4467.68,3280 4467.68,3074.49 4485.39,3056.77 4560.2,3056.77 4577.91,3074.49 R10_RC1.1 4577.91,3102.36 4587.76,3112.2 4590.4,3112.2 4655.94,3177.74 4655.94,3188.63 4648.5,3196.06 RC_RC1.1 4675.2,3214.17 4676.4,3212.97 4822.3,3212.97 R7.1
NetR8_RC1_2: R8_RC1.2 R10_RC2.1 RC_RC2.1 U3_RC2.1 | length 724.8
  Top Layer w15.75: U3_RC2.1 3890.2,3290.63 3922.05,3290.63 3932.68,3280 3932.68,3074.49 3950.39,3056.77 4025.2,3056.77 4042.91,3074.49 R10_RC2.1 4042.91,3102.36 4052.76,3112.2 4055.4,3112.2 4120.94,3177.74 4120.94,3188.63 4113.5,3196.06 RC_RC2.1 4233.5,3214.17 ; 4238.5,3214.17 R8_RC1.2 R8_RC1.2@4280.71,3215.47
NetR8_RC2_2: R8_RC2.2 R10_RC3.1 RC_RC3.1 U3_RC3.1 | length 724.8
  Top Layer w15.75: U3_RC3.1 3356.69,3290.63 3388.54,3290.63 3399.17,3280 3399.17,3074.49 3416.89,3056.77 3491.69,3056.77 3509.41,3074.49 R10_RC3.1 3509.41,3102.36 3519.25,3112.2 3521.89,3112.2 3587.43,3177.74 3587.43,3188.63 3580,3196.06 RC_RC3.1 3700,3214.17 ; 3703.5,3214.17 R8_RC2.2 R8_RC2.2@3745.71,3215.47
NetR8_RC3_2: R8_RC3.2 R10_RC4.1 RC_RC4.1 U3_RC4.1 | length 728
  Top Layer w15.75: U3_RC4.1 2821.69,3290.63 2853.54,3290.63 2864.17,3280 2864.17,3074.49 2881.89,3056.77 2956.69,3056.77 2974.41,3074.49 R10_RC4.1 2974.41,3102.36 2984.25,3112.2 2986.89,3112.2 3052.43,3177.74 3052.43,3188.63 3045,3196.06 RC_RC4.1
  Top Layer w19.68: RC_RC4.1 R8_RC3.2
NetR9_RC1_2: R9_RC1.2 R10_RC1.2 U3_RC1.4 | length 131.3
  Top Layer w15.75: R10_RC1.2@4515.75,3089.17 4514.92,3090 R10_RC1.2 4515.75,3101.22 U3_RC1.4
NetR9_RC2_2: R9_RC2.2 R10_RC2.2 U3_RC2.4 | length 131.3
  Top Layer w15.75: R10_RC2.2@3980.75,3089.17 3979.92,3090 R10_RC2.2 3980.75,3101.22 U3_RC2.4
NetR9_RC3_2: R9_RC3.2 R10_RC3.2 U3_RC3.4 | length 131.3
  Top Layer w15.75: R10_RC3.2@3447.24,3089.17 3446.42,3090 R10_RC3.2 3447.24,3101.22 U3_RC3.4
NetR9_RC4_2: R9_RC4.2 R10_RC4.2 U3_RC4.4 | length 131.3
  Top Layer w15.75: R10_RC4.2@2912.24,3089.17 2911.42,3090 R10_RC4.2 2912.24,3101.22 U3_RC4.4
pads on no net: R5.3 U4.4 U4.5 U5.4 U5.8
copper on no net: | length 3982.2
  Top Layer w10: 3208.66,4704.72 4881.89,4704.72 4881.89,4507.87 3090.55,4507.87 3090.55,4704.72 3214.53,4704.72
  other v2: 1102.36,2716.54 2923.23,2716.54 5078.74,2716.54 1102.36,3543.31 5078.74,3700.79 1102.36,4645.67 2923.23,4645.67 5078.74,4645.67

## Polygon pours and split planes (outlines as drawn)
no net on Top Layer "Top Layer-No Net 4" (solid, remove dead copper, pour order 35): 4495,3454.17 4570,3454.17 4575,3449.17 4575,3244.17 4495,3244.17
-5V on Top Layer "Top Layer--5V 3" (solid, remove dead copper, pour order 28): 2840,3244.17 2705,3244.17 2705,3369.17 2790,3369.17 2790,3279.17 2840,3279.17
no net on Top Layer "Top Layer-No Net 1" (solid, remove dead copper, pour order 34): 4445,3244.17 4310,3244.17 4310,3369.17 4395,3369.17 4395,3279.17 4445,3279.17
no net on Top Layer "Top Layer-No Net" (solid, remove dead copper, pour order 33): 3960.25,3455.68 4035.25,3455.68 4040.25,3450.68 4040.25,3245.68 3960.25,3245.68
no net on Top Layer "Top Layer-No Net 5" (solid, remove dead copper, pour order 32): 3910.25,3245.68 3775.25,3245.68 3775.25,3370.68 3860.25,3370.68 3860.25,3280.68 3910.25,3280.68
no net on Top Layer "Top Layer-No Net 3" (solid, remove dead copper, pour order 36): 3375,3244.17 3240,3244.17 3240,3369.17 3325,3369.17 3325,3279.17 3375,3279.17
no net on Top Layer "Top Layer-No Net 2" (solid, remove dead copper, pour order 37): 3425,3454.17 3500,3454.17 3505,3449.17 3505,3244.17 3425,3244.17
-5V on Top Layer "Top Layer--5V" (solid, remove dead copper, pour order 31): 3375,3244.17 3240,3244.17 3240,3369.17 3325,3369.17 3325,3279.17 3375,3279.17
-5V on Top Layer "Top Layer--5V 1" (solid, remove dead copper, pour order 30): 3908.5,3244.17 3773.5,3244.17 3773.5,3369.17 3858.5,3369.17 3858.5,3279.17 3908.5,3279.17
-5V on Top Layer "Top Layer--5V 2" (solid, remove dead copper, pour order 29): 4443.5,3244.17 4308.5,3244.17 4308.5,3369.17 4393.5,3369.17 4393.5,3279.17 4443.5,3279.17
+5V on Top Layer "Top Layer-+5V 2" (solid, remove dead copper, pour order 25): 4493.5,3454.17 4568.5,3454.17 4573.5,3449.17 4573.5,3244.17 4493.5,3244.17
+5V on Top Layer "Top Layer-+5V 1" (solid, remove dead copper, pour order 26): 3958.5,3454.17 4033.5,3454.17 4038.5,3449.17 4038.5,3244.17 3958.5,3244.17
+5V on Top Layer "Top Layer-+5V" (solid, remove dead copper, pour order 27): 3425,3454.17 3500,3454.17 3505,3449.17 3505,3244.17 3425,3244.17
+5V on Top Layer "Top Layer-+5V 3" (solid, remove dead copper, pour order 24): 2890,3454.17 2965,3454.17 2970,3449.17 2970,3244.17 2890,3244.17
GND on Bottom Layer "Bottom Layer-GND" (solid, remove dead copper, pour order 39): 1000,2598.43 1000,4763.78 5196.85,4763.78 5196.85,2598.43
no net on Bottom Layer "Bottom Layer-No Net" (solid, remove dead copper, pour order 38): 984.25,2598.43

## Other copper
Top Layer:
  text "Analog Charge Amplifier and Gausian Pulse Shaper" at 3120.08,4616.14 h78.74
  text "sixtimesseven 2019-1" at 3120.08,4537.4 h78.74

## Silkscreen, mask and mechanical layers (free items; w line width, h text height)
Top Overlay:
  lines w10: 1120,4444.21 1122.05,4442.17 1122.05,4073.71 1150.48,4045.28 1240.16,4045.28 1279.53,4005.91 1279.53,3405.51 ; 2640,3129.17 2640,3644.17 ; 3175,3134.17 3175,3649.17 ; 3710.25,3126.07 3710.25,3641.07 ; 4245,3129.17 4245,3644.17 ; 3175,3129.17 3175,3644.17 3175,3129.17 ; 3708.5,3129.17 3708.5,3644.17 3708.5,3129.17 ; 4243.5,3129.17 4243.5,3644.17 4243.5,3129.17
  text "-9V GND GND +9V" at 1309.06,4005.91 h78.74 r270
  text "Zero Pole Correction" at 1811.02,3602.36 h78.74
  text "OUTPUT" at 4980.32,3070.87 h78.74 r90
  text "INPUT" at 1269.68,3036.22 h78.74 r90
Top Solder:
  rectangle: 3074.53,4498.03 4891.73,4724.41
Mechanical 3:
  lines w10: 1397.64,4763.78 5146.85,4763.78 cw(c5146.85,4713.78) 5196.85,4713.78 5196.85,2648.43 cw(c5146.85,2648.43) 5146.85,2598.43 1053.94,2598.43 cw(c1053.94,2648.43) 1003.94,2648.43 1003.94,4713.78 cw(c1053.94,4713.78) 1053.94,4763.78 1417.32,4763.78

## Text inside footprints (layer, text, board x,y; h text height)
C21: Top Overlay "+" at 4008.9,4081.18 h59.06 r90
C22: Top Overlay "+" at 3403.9,4086.18 h59.06 r90
C23: Top Overlay "+" at 2066.34,4452.17 h59.06 r270
C27: Top Overlay "+" at 2671.34,4452.17 h59.06 r270
C28: Top Overlay "+" at 4273.9,4076.97 h59.06 r90
C29: Top Overlay "+" at 2936.34,4447.17 h59.06 r270
J1: Mechanical 3 "Board Edge" at 1001.57,2815.28 h7.87 r90